# Altium PCB NEpic_small.PcbDoc (part 2 of 2)
Units mil, origin at the board's own origin, x right, y up, seen from the top; angles counter-clockwise.
Board outline 1373 x 1857 mil, 4 copper layers (Top Layer, GND, VCC, Bottom Layer); 29 components, 61 nets, 188 pads, 110 vias.
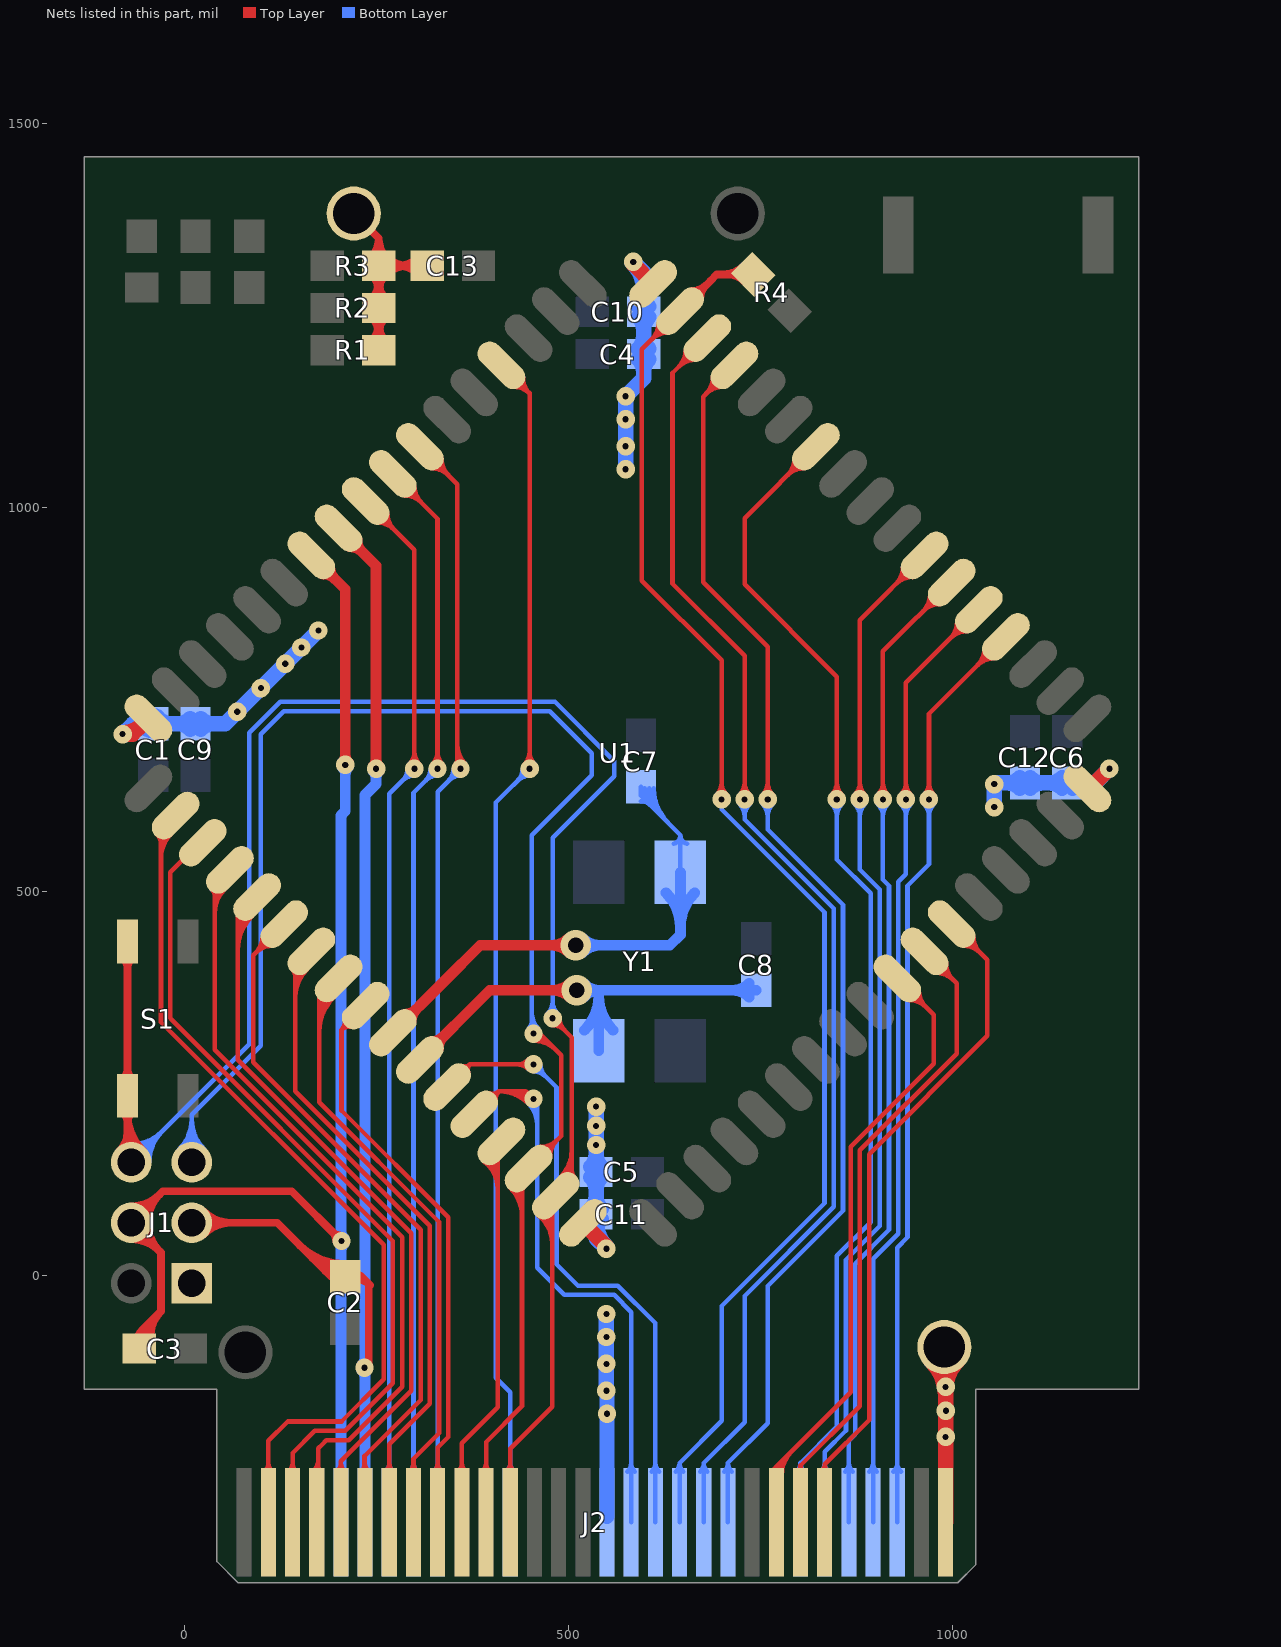
[diagram p4: the nets of this part, all layers, seen from the top]

## Via types
v1: diameter 24, hole 8, Top Layer to Bottom Layer, tented both sides, 106 vias
v2: diameter 40, hole 20, Top Layer to Bottom Layer, tented both sides, 2 vias
v3: diameter 150, hole 126, Top Layer to Bottom Layer, tented both sides, 2 vias

## Nets (pads, with @x,y where several pads share a name; then routed paths per layer and width w, separated by ;. In a path a pad name is that pad's centre, name@x,y a point inside that pad or via, vN(x,y) a via of type N, cw(c..) or ccw(c..) an arc to the next point about the centre after c; other vN are vias at no path point) (continued)
P2.0: J2.5 U1.38 | length 1379.8
  Top Layer w6: v1@963.64,626.36 ccw(c948.27,641.73) 970,641.73 ccw(c991.73,641.73) v1@976.36,626.36 ; v1(970,620) 970,731.45 U1.38@1070.28,831.72 ; U1.38@1042.22,816.41 cw(c1011.44,816.41) 1033.2,794.65 cw(c1054.96,772.89) U1.38@1054.96,803.66 ; U1.38@1048.22,816.41 cw(c1031.93,816.41) 1043.45,804.89 cw(c1054.96,793.37) U1.38@1054.96,809.66
  Bottom Layer w6: J2.5@923.86,-255.4 ccw(c912.18,-243.72) 928.7,-243.72 ccw(c945.22,-243.72) J2.5@933.54,-255.4 ; J2.5@928.7,-321.26 928.7,36.4 942,49.7 942,507.76 970,535.76 v1(970,620) ; v1@963.64,613.64 cw(c948.27,598.27) 970,598.27 cw(c991.73,598.27) v1@976.36,613.64
P2.1: J2.7 U1.39 | length 1413.5
  Top Layer w6: v1@933.64,626.36 ccw(c918.27,641.73) 940,641.73 ccw(c961.73,641.73) v1@946.36,626.36 ; v1(940,620) 940,772.16 U1.39@1034.92,867.08 ; U1.39@1006.86,851.77 cw(c976.08,851.77) 997.85,830 cw(c1019.61,808.24) U1.39@1019.61,839.02 ; U1.39@1012.86,851.77 cw(c996.57,851.77) 1008.09,840.25 cw(c1019.61,828.73) U1.39@1019.61,845.02
  Bottom Layer w6: J2.7@892.37,-255.4 ccw(c880.69,-243.72) 897.2,-243.72 ccw(c913.72,-243.72) J2.7@902.04,-255.4 ; J2.7@897.2,-321.26 897.2,21.88 930,54.67 930,512.73 940,522.73 v1(940,620) ; v1@933.64,613.64 cw(c918.27,598.27) 940,598.27 cw(c961.73,598.27) v1@946.36,613.64
P2.3: J2.9 U1.40 | length 1453.9
  Top Layer w6: v1@903.64,626.36 ccw(c888.27,641.73) 910,641.73 ccw(c931.73,641.73) v1@916.36,626.36 ; v1(910,620) 910,812.87 U1.40@999.56,902.43 ; U1.40@971.5,887.12 cw(c940.73,887.12) 962.49,865.36 cw(c984.25,843.6) U1.40@984.25,874.37 ; U1.40@977.5,887.12 cw(c961.21,887.12) 972.73,875.6 cw(c984.25,864.08) U1.40@984.25,880.37
  Bottom Layer w6: J2.9@860.87,-255.4 ccw(c849.19,-243.72) 865.71,-243.72 ccw(c882.23,-243.72) J2.9@870.55,-255.4 ; J2.9@865.71,-321.26 865.71,-214.95 874,-206.66 874,15.64 918,59.64 918,507.76 910,515.76 v1(910,620) ; v1@903.64,613.64 cw(c888.27,598.27) 910,598.27 cw(c931.73,598.27) v1@916.36,613.64
P2.6: J2.11 U1.41 | length 1502.6
  Top Layer w6: v1@873.64,626.36 ccw(c858.27,641.73) 880,641.73 ccw(c901.73,641.73) v1@886.36,626.36 ; v1(880,620) 880,853.58 U1.41@964.21,937.79 ; U1.41@936.15,922.48 cw(c905.37,922.48) 927.14,900.71 cw(c948.9,878.95) U1.41@948.9,909.73 ; U1.41@942.15,922.48 cw(c925.86,922.48) 937.38,910.96 cw(c948.9,899.44) U1.41@948.9,915.73
  Bottom Layer w6: J2.11@829.37,-255.4 ccw(c817.69,-243.72) 834.21,-243.72 ccw(c850.73,-243.72) J2.11@839.05,-255.4 ; J2.11@834.21,-321.26 834.21,-229.47 862,-201.69 862,20.61 906,64.61 906,502.79 880,528.79 v1(880,620) ; v1@873.64,613.64 cw(c858.27,598.27) 880,598.27 cw(c901.73,598.27) v1@886.36,613.64
P5.0: J2.58 U1.2 | length 1271.1
  Top Layer w6: U1.2@-35.31,574.66 cw(c-48.13,561.84) -30,561.84 ; -30,543.96 cw(c13.42,543.96) U1.2@-17.28,574.66 ; -30,558.45 cw(c-1.07,558.45) U1.2@-21.53,578.91 ; U1.2@-27,582.98 U1.2@-10.99,598.99 -30,579.98 -30,330 260,40 260,-135 205,-190 135,-190 109.8,-215.2 J2.58@109.8,-321.26 ; J2.58@104.96,-255.4 ccw(c93.28,-243.72) 109.8,-243.72 ccw(c126.32,-243.72) J2.58@114.64,-255.4
P5.1: J2.56 U1.3 | length 1161.1
  Top Layer w6: U1.3@1,540.26 U1.3@24.37,563.63 20.63,563.63 -18,525 -18,334.97 272,44.97 272,-139.97 209.97,-202 170.3,-202 141.3,-231 J2.56@141.3,-321.26 ; J2.56@136.46,-255.4 ccw(c124.78,-243.72) 141.3,-243.72 ccw(c157.82,-243.72) J2.56@146.14,-255.4
P5.2: J2.54 U1.4 | length 1152.8
  Top Layer w6: U1.4@35.4,503.95 cw(c24.29,492.84) 40,492.84 ; U1.4@37,505.55 U1.4@59.72,528.28 40,508.55 40,293.94 284,49.94 284,-144.94 214.31,-214.63 185.37,-214.63 180,-220 175,-225 175,-319.06 J2.54@172.8,-321.26 ; 40,471.54 cw(c85.84,471.54) U1.4@53.43,503.95 ; 40,486.02 cw(c71.36,486.02) U1.4@49.18,508.2 ; J2.54@167.96,-255.4 ccw(c150.95,-238.39) 175,-238.39 ; 175,-249.04 ccw(c183.99,-249.04) J2.54@177.63,-255.4
P5.3: J2.52 U1.5 | length 1123.2
  Top Layer w6: 70,423.25 cw(c134.13,423.25) U1.5@88.78,468.6 ; 70,437.74 cw(c119.64,437.74) U1.5@84.54,472.84 ; 70,452.22 cw(c105.16,452.22) U1.5@80.3,477.08 ; U1.5@78,475.84 U1.5@95.08,492.92 70,467.84 70,280.91 296,54.91 296,-149.91 204.29,-241.62 J2.52@204.29,-321.26 ; J2.52@199.45,-255.4 ccw(c187.77,-243.72) 204.29,-243.72 ccw(c220.81,-243.72) J2.52@209.13,-255.4
P5.4: J2.50 U1.6 | length 1042.4
  Top Layer w6: U1.6@102.38,442.26 cw(c71.6,442.26) 93.36,420.49 cw(c115.12,398.73) U1.6@115.12,429.51 ; U1.6@108.38,442.26 cw(c92.09,442.26) 103.61,430.74 cw(c115.12,419.22) U1.6@115.12,435.51 ; U1.6@112,439.13 U1.6@130.44,457.57 90,417.13 90,277.88 308,59.88 308,-162 235,-235 235,-320.47 J2.50@235.79,-321.26 ; J2.50@230.95,-255.4 ccw(c221.17,-245.62) 235,-245.62 ; 235,-241.82 ccw(c254.21,-241.82) J2.50@240.63,-255.4
P5.5: J2.48 U1.7 | length 964.3
  Top Layer w6: U1.7@141.46,397.89 cw(c132.93,389.35) 145,389.35 ; 145,362.9 cw(c194.48,362.9) U1.7@159.49,397.89 ; 145,377.38 cw(c180,377.38) U1.7@155.25,402.13 ; 145,391.87 cw(c165.51,391.87) U1.7@151.01,406.37 ; U1.7@165.79,422.21 145,401.42 145,239.85 320,64.85 320,-166.97 267.28,-219.69 J2.48@267.28,-321.26 ; J2.48@262.45,-255.4 ccw(c250.76,-243.72) 267.28,-243.72 ccw(c283.8,-243.72) J2.48@272.12,-255.4
P5.6: J2.46 U1.8 | length 973.5
  Top Layer w6: 175.99,316.99 cw(c240.39,316.99) U1.8@194.85,362.53 ; 175.99,331.47 cw(c225.9,331.47) U1.8@190.61,366.77 ; 175.99,345.96 cw(c211.42,345.96) U1.8@186.36,371.02 ; U1.8@177.79,363.5 U1.8@201.15,386.86 175.99,361.7 175.99,225.84 332,69.82 332,-205.16 298.78,-238.38 J2.46@298.78,-321.26 ; J2.46@293.94,-255.4 ccw(c282.26,-243.72) 298.78,-243.72 ccw(c315.3,-243.72) J2.46@303.62,-255.4
P5.7: J2.44 U1.9 | length 834.3
  Top Layer w6: U1.9@208.78,333.28 cw(c194.97,330.03) 205,320 ; U1.9@215,330 U1.9@236.5,351.5 205,320 ; U1.9@218.28,323.78 ccw(c215.03,309.97) 205,320 ; J2.44@325.44,-255.4 ccw(c313.76,-243.72) 330.28,-243.72 ccw(c346.79,-243.72) J2.44@335.11,-255.4 ; J2.44@330.28,-321.26 330.28,-223.86 344,-210.13 344,76 205,215 205,320
RADIO_CCA: J2.21 U1.49 | length 1891.2
  Top Layer w6: U1.49@653.31,1205.32 cw(c622.53,1205.32) 644.29,1183.56 cw(c666.05,1161.79) U1.49@666.05,1192.57 ; U1.49@659.31,1205.32 cw(c643.02,1205.32) 654.54,1193.8 cw(c666.05,1182.28) U1.49@666.05,1198.57 ; U1.49@681.37,1220.63 636,1175.26 636,901 730,807 v1(730,620) v1@725.79,624.21 ; v1@723.64,626.36 ccw(c708.27,641.73) 730,641.73 ccw(c751.73,641.73) v1@736.36,626.36
  Bottom Layer w6: J2.21@671.95,-255.34 ccw(c660.89,-244) 676.73,-244 ; J2.21@676.73,-321.26 676.73,-244 ; J2.21@681.51,-255.34 cw(c692.57,-244) 676.73,-244 ; v1@723.64,613.64 cw(c708.27,598.27) 730,598.27 cw(c751.73,598.27) v1@736.36,613.64 ; v1(730,620) 730,593.94 846,477.94 846,89.46 730,-26.54 730,-190.73 676.73,-244
RADIO_CS: J2.19 U1.48 | length 1828.3
  Top Layer w6: U1.48@688.66,1169.96 cw(c657.89,1169.96) 679.65,1148.2 cw(c701.41,1126.44) U1.48@701.41,1157.22 ; U1.48@694.66,1169.96 cw(c678.37,1169.96) 689.89,1158.45 cw(c701.41,1146.93) U1.48@701.41,1163.22 ; U1.48@716.72,1185.28 676,1144.55 676,903.09 760,819.09 v1(760,620) ; v1@753.64,626.36 ccw(c738.27,641.73) 760,641.73 ccw(c781.73,641.73) v1@766.36,626.36
  Bottom Layer w6: J2.19@703.45,-255.34 ccw(c692.39,-244) 708.23,-244 ; J2.19@708.23,-321.26 708.23,-244 ; J2.19@713.01,-255.34 cw(c724.07,-244) 708.23,-244 ; v1@753.64,613.64 cw(c738.27,598.27) 760,598.27 cw(c781.73,598.27) v1@766.36,613.64 ; v1(760,620) 760,580.91 858,482.91 858,84.49 760,-13.51 760,-192.23 708.23,-244
RADIO_SFD: J2.23 R4.1 U1.50 | length 2122.3
  Top Layer w6: U1.50@617.95,1240.67 cw(c587.18,1240.67) 608.94,1218.91 cw(c630.7,1197.15) U1.50@630.7,1227.93 ; U1.50@623.95,1240.67 cw(c607.66,1240.67) 619.18,1229.16 cw(c630.7,1217.64) U1.50@630.7,1233.93 ; U1.50@648.66,1255.99 U1.50@646.01,1255.99 596,1205.97 596,905 700,801 v1(700,620) ; v1@693.64,626.36 ccw(c678.27,641.73) 700,641.73 ccw(c721.73,641.73) v1@706.36,626.36
  Top Layer w10: U1.50@646.01,1255.99 685,1294.97 ; U1.50@661.32,1282.05 ccw(c661.32,1307.99) 679.67,1289.65 ccw(c698.02,1271.3) U1.50@672.07,1271.3 ; 685,1295 693.66,1303.66 R4.1@741.34,1303.66 ; 701.13,1303.66 ccw(c701.13,1343.87) R4.1@729.56,1315.44 ; 707.85,1303.66 cw(c707.85,1272.96) R4.1@729.56,1294.67
  Bottom Layer w6: J2.23@640.46,-255.34 ccw(c629.4,-244) 645.24,-244 ; J2.23@645.24,-321.26 645.24,-244 ; J2.23@650.01,-255.34 cw(c661.08,-244) 645.24,-244 ; v1(700,620) 700,606.97 834,472.97 834,94.43 700,-39.57 700,-189.24 645.24,-244
RFTXRX: J2.13 U1.45 | length 1712.1
  Top Layer w6: U1.45@794.73,1063.9 cw(c763.95,1063.9) 785.71,1042.14 cw(c807.48,1020.37) U1.45@807.48,1051.15 ; U1.45@800.73,1063.9 cw(c784.44,1063.9) 795.96,1052.38 cw(c807.48,1040.86) U1.45@807.48,1057.15 ; U1.45@822.79,1079.21 730,986.42 730,900 850,780 v1(850,620) ; v1@843.64,626.36 ccw(c828.27,641.73) 850,641.73 ccw(c871.73,641.73) v1@856.36,626.36
  Bottom Layer w6: J2.13@797.94,-255.34 ccw(c786.88,-244) 802.72,-244 ; J2.13@802.72,-321.26 802.72,-244 ; J2.13@807.49,-255.34 cw(c818.56,-244) 802.72,-244 ; v1@843.64,613.64 cw(c828.27,598.27) 850,598.27 cw(c871.73,598.27) v1@856.36,613.64 ; v1(850,620) 850,541.82 894,497.82 894,69.58 850,25.58 850,-196.72 802.72,-244
RST: J1.6 J2.38 S1.2 S1.4 U1.16 | length 3204.4
  Top Layer w6: J2.38@419.93,-255.4 ccw(c408.24,-243.72) 424.76,-243.72 ccw(c441.28,-243.72) J2.38@429.6,-255.4 ; J2.38@424.76,-321.26 424.76,-225.24 479.28,-170.72 479.28,43.1 479.28,99.31 U1.16@483.99,104.01 505,125.02 505,310 v1(480,335) ; U1.16@461.01,78.52 cw(c433.42,41.88) 479.28,41.88 ; U1.16@464.62,83.31 cw(c442.48,53.91) 479.28,53.91 ; U1.16@468.23,88.11 cw(c451.54,65.94) 479.28,65.94 ; v1@480,326 cw(c480,304.27) 495.36,319.64 cw(c510.73,335) v1@489,335 ; U1.16@490.29,128.34 ccw(c454.77,163.86) 505,163.86 ; U1.16@494.53,124.1 ccw(c469.25,149.37) 505,149.37 ; U1.16@498.77,119.85 ccw(c483.74,134.89) 505,134.89 ; 505,136.34 ccw(c516.32,136.34) U1.16@508.32,128.34
  Top Layer w10: J1.6@-83.94,162.68 ccw(c-108.57,187.31) -73.74,187.31 ccw(c-28.91,187.31) J1.6@-60.61,155.61 ; S1.2@-79.95,213.24 cw(c-94.94,198.25) -73.74,198.25 cw(c-52.54,198.25) S1.2@-67.53,213.24 ; S1.2@-79.95,255.18 ccw(c-94.94,270.17) -73.74,270.17 ccw(c-52.54,270.17) S1.2@-67.53,255.18 ; S1.4@-79.95,414.03 cw(c-94.94,399.04) -73.74,399.04 cw(c-52.54,399.04) S1.4@-67.53,414.03 ; S1.2@-73.74,211.46 ccw(c-4.76,211.46) J1.6@-53.54,162.68 ; S1.4@-73.74,430 -73.74,229.21 -73.74,152.48 J1.6@-68.74,147.48
  Bottom Layer w6: J1.6@-68.74,147.48 85,301.22 85,706.97 125.03,747 473.06,747 483,747 560,670 560,663.33 560,650 480,570 v1(480,335) ; J1.6@-68.74,158.98 ccw(c-68.74,186.74) -49.11,167.11 ccw(c-29.48,147.48) J1.6@-57.24,147.48 ; J1.6@-68.74,164.98 ccw(c-68.74,207.23) -38.87,177.35 ccw(c-8.99,147.48) J1.6@-51.24,147.48 ; J1.6@-68.74,170.98 ccw(c-68.74,227.71) -28.62,187.6 ccw(c11.49,147.48) J1.6@-45.24,147.48 ; v1@473.64,341.36 ccw(c458.27,356.73) 480,356.73 ccw(c501.73,356.73) v1@486.36,341.36
SCLK0/SCL: J2.43 U1.58 | length 1619.2
  Top Layer w6: U1.58@307.21,1079.21 356,1030.42 356,664 v1(360,660) ; U1.58@322.52,1051.15 cw(c322.52,1020.37) 344.29,1042.14 cw(c366.05,1063.9) U1.58@335.27,1063.9 ; U1.58@322.52,1057.15 cw(c322.52,1040.86) 334.04,1052.38 cw(c345.56,1063.9) U1.58@329.27,1063.9 ; v1@353.64,666.36 ccw(c347.93,672.07) 356,672.07 ; 356,676.9 ccw(c376.9,676.9) v1@362.12,662.12 ; 356,691.38 ccw(c391.38,691.38) v1@366.36,666.36
  Bottom Layer w6: J2.43@325.44,-255.4 ccw(c313.76,-243.72) 330.28,-243.72 ccw(c346.79,-243.72) J2.43@335.11,-255.4 ; J2.43@330.28,-321.26 330.28,630.28 v1(360,660) ; v1@351,660 cw(c329.27,660) 344.64,644.64 cw(c360,629.27) v1@360,651
STE0: J2.37 U1.55 | length 1686.4
  Top Layer w6: U1.55@413.28,1185.28 449.28,1149.28 ; U1.55@429.05,1157.23 cw(c430.05,1130.05) 449.28,1149.28 ; U1.55@441.33,1169.5 ccw(c468.51,1168.51) 449.28,1149.28 ; v1@443.64,666.36 ccw(c428.27,681.73) 450,681.73 ccw(c471.73,681.73) v1@456.36,666.36 ; v1(450,660) 450,1149.28
  Bottom Layer w6: J2.37@419.93,-255.4 ccw(c408.24,-243.72) 424.76,-243.72 ccw(c441.28,-243.72) J2.37@429.6,-255.4 ; J2.37@424.76,-321.26 424.76,-151.73 406,-132.97 406,616 v1(450,660) ; v1@441,660 cw(c419.27,660) 434.64,644.64 cw(c450,629.27) v1@450,651
TCK: J1.5 J2.40 U1.15 | length 2655.6
  Top Layer w6: J2.40@388.43,-255.4 ccw(c376.75,-243.72) 393.27,-243.72 ccw(c409.79,-243.72) J2.40@398.11,-255.4 ; J2.40@393.27,-321.26 393.27,-216.73 440,-170 440,130.74 U1.15@448.63,139.37 491,181.74 491,287.03 463.03,315 v1(455,315) ; U1.15@424.31,115.04 cw(c386.43,77.16) 440,77.16 ; U1.15@428.55,119.29 cw(c400.91,91.65) 440,91.65 ; U1.15@432.79,123.53 cw(c415.4,106.13) 440,106.13 ; 440,109.4 cw(c447.98,109.4) U1.15@442.34,115.04 ; v1@455,306 cw(c455,264.89) 484.07,293.96 ; v1@455,312 cw(c455,285.37) 473.83,304.2 ; U1.15@463.95,161.43 ccw(c463.95,177.72) 475.46,166.2 ccw(c486.98,154.68) U1.15@470.69,154.68 ; U1.15@463.95,167.43 ccw(c463.95,198.21) 485.71,176.44 ccw(c507.47,154.68) U1.15@476.69,154.68
  Bottom Layer w6: J1.5@-6.62,164.1 ccw(c-46.73,204.21) 10,204.21 ccw(c66.73,204.21) J1.5@26.62,164.1 ; J1.5@-2.37,159.85 ccw(c-32.25,189.73) 10,189.73 ccw(c52.25,189.73) J1.5@22.37,159.85 ; J1.5@1.87,155.61 ccw(c-17.76,175.24) 10,175.24 ccw(c37.76,175.24) J1.5@18.13,155.61 ; J1.5@10,147.48 10,209.25 100,299.25 100,705 130,735 476,735 531,680 531,651.3 518.7,639 453,573.3 453,325.03 v1@463.79,314.24 ; v1@448.64,321.36 ccw(c438.1,331.9) 453,331.9 ; 453,327.07 ccw(c467.07,327.07) v1@457.12,317.12 ; 453,341.56 ccw(c481.56,341.56) v1@461.36,321.36
TDI/TCLK: J2.27 U1.13 | length 934.3
  Top Layer w6: U1.13@377.92,210.08 380.08,210.08 410,240 ; U1.13@397.7,237.33 ccw(c401.78,248.22) 410,240 ; U1.13@405.84,227.31 cw(c420.45,229.54) 410,240 ; 424.21,240 cw(c424.21,200.04) v1@452.85,227.91 ; 438.42,240 cw(c438.42,213.87) v1@457.15,232.09 ; v1@448.55,223.72 ccw(c410,186.22) 410,240 ; v1(455,230) 445,240 410,240
  Bottom Layer w6: v1@448.64,223.64 cw(c421.2,196.2) 460,196.2 ; v1@452.88,227.88 cw(c435.69,210.69) 460,210.69 ; v1(455,230) 460,225 460,10 495,-25 560,-25 582.5,-47.5 582.24,-47.76 J2.27@582.24,-321.26 ; J2.27@577.41,-255.4 ccw(c565.72,-243.72) 582.24,-243.72 ccw(c598.76,-243.72) J2.27@587.08,-255.4
TDO/TDI: J2.25 U1.12 | length 939.6
  Top Layer w6: U1.12@337.86,240.73 U1.12@342.57,245.44 372.13,275 ; U1.12@362.16,272.75 ccw(c365.37,281.76) 372.13,275 ; U1.12@369.89,265.03 cw(c378.89,268.24) 372.13,275 ; v1@448.64,268.64 ccw(c433.27,253.27) 433.27,275 ccw(c433.27,296.73) v1@448.64,281.36 ; v1(455,275) 372.13,275
  Bottom Layer w6: v1@455,266 cw(c455,244.27) 470.36,259.64 cw(c485.73,275) v1@464,275 ; v1(455,275) 485,245 485,15 513,-13 564.97,-13 613.74,-61.77 J2.25@613.74,-321.26 ; J2.25@608.9,-255.4 ccw(c597.22,-243.72) 613.74,-243.72 ccw(c630.26,-243.72) J2.25@618.58,-255.4
TMS: J2.42 U1.14 | length 645.4
  Top Layer w6: J2.42@356.93,-255.4 ccw(c345.25,-243.72) 361.77,-243.72 ccw(c378.29,-243.72) J2.42@366.61,-255.4 ; J2.42@361.77,-321.26 361.77,-218.23 408.57,-171.43 408.57,113.81 408.57,170.02 U1.14@413.28,174.72 ; U1.14@390.3,149.23 cw(c362.72,112.59) 408.57,112.59 ; U1.14@393.91,154.02 cw(c371.77,124.62) 408.57,124.62 ; U1.14@397.52,158.82 cw(c380.83,136.65) 408.57,136.65
UART0RX: J2.47 U1.60 | length 1537.8
  Top Layer w6: U1.60@236.5,1008.5 300,945 v1(300,660) ; U1.60@251.81,980.44 cw(c251.81,949.66) 273.58,971.42 cw(c295.34,993.19) U1.60@264.56,993.19 ; U1.60@251.81,986.44 cw(c251.81,970.15) 263.33,981.67 cw(c274.85,993.19) U1.60@258.56,993.19 ; v1@293.64,666.36 ccw(c278.27,681.73) 300,681.73 ccw(c321.73,681.73) v1@306.36,666.36
  Bottom Layer w6: J2.47@262.45,-255.4 ccw(c250.76,-243.72) 267.28,-243.72 ccw(c283.8,-243.72) J2.47@272.12,-255.4 ; J2.47@267.28,-321.26 267.28,627.28 v1(300,660) ; v1@291,660 cw(c269.27,660) 284.64,644.64 cw(c300,629.27) v1@300,651
UART0TX: J2.45 U1.59 | length 1570.3
  Top Layer w6: U1.59@271.86,1043.85 330,985.71 v1(330,660) ; U1.59@287.17,1015.79 cw(c287.17,985.02) 308.93,1006.78 cw(c330.69,1028.54) U1.59@299.92,1028.54 ; U1.59@287.17,1021.79 cw(c287.17,1005.5) 298.69,1017.02 cw(c310.21,1028.54) U1.59@293.92,1028.54 ; v1@323.64,666.36 ccw(c308.27,681.73) 330,681.73 ccw(c351.73,681.73) v1@336.36,666.36
  Bottom Layer w6: J2.45@293.94,-255.4 ccw(c282.26,-243.72) 298.78,-243.72 ccw(c315.3,-243.72) J2.45@303.62,-255.4 ; J2.45@298.78,-321.26 298.78,628.78 v1(330,660) ; v1@321,660 cw(c299.27,660) 314.64,644.64 cw(c330,629.27) v1@330,651
UART1RX: C3.2 J1.4 J2.51 U1.62 | length 2297.5
  Top Layer w10: J1.4@-68.74,47.24 cw(c-68.74,-4.67) -32.04,32.04 cw(c4.67,68.74) -47.24,68.74 cw(c4.67,68.74) -32.04,105.44 cw(c-68.74,142.15) J1.4@-68.74,90.24 ; J1.4@-68.74,57.24 cw(c-68.74,29.48) -49.11,49.11 cw(c-29.48,68.74) -57.24,68.74 cw(c-29.48,68.74) -49.11,88.37 cw(c-68.74,108) J1.4@-68.74,80.24 ; C3.2@-61.71,-81.27 ccw(c-65.42,-71.54) -55,-71.54 ; C3.2@-61.64,-96.32 cw(c-36.32,-89.83) -54.81,-71.34 ; C3.2@-55,-95 -55,-71.54 ; C3.2@-51.96,-93.84 cw(c-16.58,-84.77) -42.4,-58.94 ; C3.2@-48.86,-82.45 cw(c-42.22,-71.54) -55,-71.54 ; C3.2@-42.27,-91.35 cw(c3.17,-79.7) -30,-46.54 ; v1@198,45 ccw(c181.1,45) 193.05,56.95 ccw(c205,68.9) v1@205,52 ; v1(205,45) 140,110 25.55,110 -27.5,109.98 J1.4@-68.74,68.74 -30,30 -30,-46.54 ; -55,-71.54 -30,-46.54
  Top Layer w14: U1.62@165.79,937.79 210,893.58 v1(210,665) ; U1.62@181.1,913.73 cw(c181.1,892.61) 196.04,907.54 cw(c210.97,922.48) U1.62@189.85,922.48 ; v1@206.46,668.54 ccw(c197.93,677.07) 210,677.07 ccw(c222.07,677.07) v1@213.54,668.54
  Bottom Layer w14: J2.51@204.29,-321.26 204.29,599.2 210,604.91 v1(210,665) ; 204.29,31.22 cw(c218.78,31.22) v1@208.54,41.46 ; 204.29,58.78 ccw(c218.78,58.78) v1@208.54,48.54 ; v1@206.46,661.46 cw(c197.93,652.93) 210,652.93 cw(c222.07,652.93) v1@213.54,661.46
UART1TX: C2.2 J1.3 J2.49 U1.61 | length 2138.6
  Top Layer w10: J1.3@10,68.74 121.26,68.74 191.54,-1.54 C2.2@210,-1.54 231.54,-1.54 ; J1.3@18.13,60.61 cw(c37.76,40.98) 37.76,68.74 cw(c37.76,96.5) J1.3@18.13,76.87 ; J1.3@25.2,53.54 cw(c61.91,16.83) 61.91,68.74 cw(c61.91,120.65) J1.3@25.2,83.94 ; 150.05,39.95 ccw(c210,99.9) C2.2@210,15.12 ; 167.12,22.88 ccw(c210,65.76) C2.2@210,5.12 ; 184.19,5.81 ccw(c210,31.61) C2.2@210,-4.88 ; C2.2@207.62,1.25 cw(c217.4,-18.27) 232.83,-2.83 ; C2.2@212.1,-7.69 cw(c223.94,-31.33) 242.63,-12.63 ; C2.2@223.67,-6.9 cw(c231.53,-9.98) 231.53,-1.54 ; C2.2@223.67,3.83 ccw(c231.53,6.91) 231.53,-1.54 ; v1(235,-120) 240.69,-114.31 240.69,-10.69 231.54,-1.54
  Top Layer w14: U1.61@201.15,973.14 250,924.29 v1(250,660) ; U1.61@216.46,949.08 cw(c216.46,927.96) 231.39,942.9 cw(c246.32,957.83) U1.61@225.21,957.83 ; v1@246.46,663.54 ccw(c237.93,672.07) 250,672.07 ccw(c262.07,672.07) v1@253.54,663.54
  Bottom Layer w14: v1@231.46,-123.54 cw(c221.03,-133.97) 235.79,-133.97 ; v1@231.46,-116.46 ccw(c221.03,-106.03) 235.79,-106.03 ; J2.49@235.79,-321.26 235.79,625.79 250,640 v1(250,660) ; v1@246.46,656.46 cw(c237.93,647.93) 250,647.93 cw(c262.07,647.93) v1@253.54,656.46
VCC: C1.2 C4.2 C5.2 C6.2 C9.2 C10.2 C11.2 C12.2 C13.2 J1.1 J2.2 J2.29 pad.0@221,1383 pad.0@990,-93 R1.1 R2.1 R3.1 U1.17 U1.34 U1.51 U1.68 | length 3237.5
  Top Layer w6: U1.34@1176.34,632.12 U1.34@1176.34,634.34
  Top Layer w10: pad.0@221,1383 253.46,1350.54 R3.1@253.46,1315 ; R1.1@243.08,1215.38 ccw(c218.01,1240.45) 253.46,1240.45 ccw(c288.92,1240.45) R1.1@263.85,1215.38 ; R2.1@243.08,1249.62 cw(c218.01,1224.55) 253.46,1224.55 cw(c288.92,1224.55) R2.1@263.85,1249.62 ; R2.1@243.08,1270.38 ccw(c218.01,1295.45) 253.46,1295.45 ccw(c288.92,1295.45) R2.1@263.85,1270.38 ; R3.1@243.08,1304.62 cw(c218.01,1279.55) 253.46,1279.55 cw(c288.92,1279.55) R3.1@263.85,1304.62 ; R3.1@243.08,1325.38 ccw(c218.01,1350.45) 253.46,1350.45 ccw(c288.92,1350.45) R3.1@263.85,1325.38 ; R1.1@253.46,1205 R2.1@253.46,1260 R3.1@253.46,1315 ; R3.1@265.82,1304.62 cw(c290.89,1279.55) 290.89,1315 cw(c290.89,1350.45) R3.1@265.82,1325.38 ; C13.2@304.18,1304.62 ccw(c279.11,1279.55) 279.11,1315 ccw(c279.11,1350.45) C13.2@304.18,1325.38 ; C13.2@316.54,1315 R3.1@253.46,1315 ; v1@585,1317 v1(585,1320) ; U1.34@1176.34,634.34 U1.34@1179.34,634.34
  Top Layer w20: v1(-80,705) -67,705 U1.68@-46.34,725.66 -58.53,713.46 ; v1@-80,707 ccw(c-80,743.22) U1.68@-54.39,717.61 ; U1.17@519.34,68.66 550,38 v1(550,35) ; v1@585,1317 U1.51@610.66,1291.34 ; pad.0@972.15,-110.85 cw(c924.95,-158.05) 991.69,-158.05 ; J2.2@991.69,-321.26 pad.0@991.69,-100 ; v1@991.69,-149.87 cw(c1046.87,-149.87) pad.0@1007.85,-110.85 ; U1.34@1176.34,640.09 ccw(c1176.34,661.22) 1191.28,646.28 ; U1.34@1179.34,634.34 v1(1205,660)
  Bottom Layer w6: v1(550,-150) v1@550.75,-150.75
  Bottom Layer w10: v1(1055,640) v1@1056.54,641.54
  Bottom Layer w20: v1(-80,705) -66.54,718.46 C9.2@15,718.46 53.46,718.46 v1(175,840) ; v1@-79.8,705.2 cw(c-59.09,684.49) C1.2@-44.74,710.02 ; v1@-78.59,703.59 cw(c-42.67,667.67) C1.2@-42.67,718.46 ; -67.44,717.56 cw(c-44.17,694.28) C1.2@-38.1,726.63 ; -61.15,723.85 cw(c-45.67,708.37) C1.2@-34.95,727.46 ; C1.2@-46.85,711.62 ccw(c-63.38,695.08) -63.38,718.46 ccw(c-63.38,741.85) C1.2@-46.85,725.31 ; C1.2@-33.15,711.62 cw(c-16.62,695.08) -16.62,718.46 cw(c-16.62,741.85) C1.2@-33.15,725.31 ; C9.2@8.15,711.62 ccw(c-8.38,695.08) -8.38,718.46 ccw(c-8.38,741.85) C9.2@8.15,725.31 ; C9.2@21.85,711.62 cw(c38.38,695.08) 38.38,718.46 cw(c38.38,741.85) C9.2@21.85,725.31 ; C11.2@529.69,73.15 cw(c513.15,56.62) 536.54,56.62 cw(c559.92,56.62) C11.2@543.38,73.15 ; C11.2@529.69,86.85 ccw(c513.15,103.38) 536.54,103.38 ccw(c559.92,103.38) C11.2@543.38,86.85 ; C5.2@529.69,128.15 cw(c513.15,111.62) 536.54,111.62 cw(c559.92,111.62) C5.2@543.38,128.15 ; C5.2@529.69,141.85 ccw(c513.15,158.38) 536.54,158.38 ccw(c559.92,158.38) C5.2@543.38,141.85 ; C11.2@536.54,72.33 ccw(c587.33,72.33) v1@551.41,36.41 ; v1(536.54,220) C5.2@536.54,135 536.54,48.46 v1(550,35) ; v1(550,-150) v1(550,-50) ; J2.29@550.75,-313.39 v1@550.75,-150.75 ; v1(575,1050) v1(575,1145) 598.46,1168.46 598.46,1306.54 v1(585,1320) ; v1@583.59,1318.59 cw(c547.67,1282.67) 598.46,1282.67 ; C4.2@591.62,1193.15 cw(c575.08,1176.62) 598.46,1176.62 cw(c621.85,1176.62) C4.2@605.31,1193.15 ; C4.2@591.62,1206.85 ccw(c575.08,1223.38) 598.46,1223.38 ccw(c621.85,1223.38) C4.2@605.31,1206.85 ; C10.2@591.62,1248.15 cw(c575.08,1231.62) 598.46,1231.62 cw(c621.85,1231.62) C10.2@605.31,1248.15 ; C10.2@591.62,1261.85 ccw(c575.08,1278.38) 598.46,1278.38 ccw(c621.85,1278.38) C10.2@605.31,1261.85 ; v1(1055,610) v1(1055,640) ; v1@1056.54,641.54 C12.2@1095,641.54 1186.54,641.54 v1(1205,660) ; C12.2@1088.15,634.69 ccw(c1071.62,618.15) 1071.62,641.54 ccw(c1071.62,664.92) C12.2@1088.15,648.38 ; C12.2@1101.85,634.69 cw(c1118.38,618.15) 1118.38,641.54 cw(c1118.38,664.92) C12.2@1101.85,648.38 ; C6.2@1143.15,634.69 ccw(c1126.62,618.15) 1126.62,641.54 ccw(c1126.62,664.92) C6.2@1143.15,648.38 ; C6.2@1156.85,634.69 cw(c1173.38,618.15) 1173.38,641.54 cw(c1173.38,664.92) C6.2@1156.85,648.38
  other v1: 991.69,-210 550.75,-180 992,-176 991.69,-145 550,-115 550,-80 536.54,170 536.54,195 69.29,734.29 100,765 131.76,796.76 152.82,817.82 575,1080 575,1115
VEREF+: J2.14 U1.28 | length 936.1
  Top Layer w6: J2.14@798.86,-254.58 ccw(c793.88,-247.28) 802.72,-247.28 ; J2.14@802.72,-321.26 802.72,-247.28 ; J2.14@806.57,-254.58 cw(c811.55,-247.28) 802.72,-247.28 ; U1.28@964.21,422.21 1006,380.42 1006,289.03 880,163.03 880,-65.98 880,-136.49 880,-156.97 880,-170 802.72,-247.28 ; U1.28@979.52,394.15 cw(c979.52,363.38) 1001.28,385.14 cw(c1023.05,406.9) U1.28@992.27,406.9 ; U1.28@979.52,400.15 cw(c979.52,383.86) 991.04,395.38 cw(c1002.56,406.9) U1.28@986.27,406.9
VREF+: J2.16 U1.27 | length 969.6
  Top Layer w6: J2.16@766.06,-260.24 cw(c781.27,-260.24) 770.52,-249.48 ; J2.16@767.98,-254.21 ccw(c765.05,-248.78) 771.22,-248.78 ; J2.16@771.22,-321.26 771.22,-248.78 ; J2.16@772.06,-260.24 cw(c801.76,-260.24) 780.76,-239.24 ; J2.16@774.46,-254.21 cw(c777.39,-248.78) 771.22,-248.78 ; J2.16@778.06,-260.24 cw(c822.24,-260.24) 791,-229 ; U1.27@928.85,386.86 976,339.71 976,276 868,168 868,-70.95 868,-131.52 868,-152 771.22,-248.78 ; U1.27@944.17,358.8 cw(c944.17,328.02) 965.93,349.78 cw(c987.69,371.54) U1.27@956.91,371.54 ; U1.27@944.17,364.8 cw(c944.17,348.51) 955.68,360.03 cw(c967.2,371.54) U1.27@950.91,371.54
VREF-: J2.12 U1.29 | length 980.7
  Top Layer w6: J2.12@829.88,-254.94 ccw(c822.38,-245.79) 834.21,-245.79 ; J2.12@834.21,-321.26 834.21,-245.79 ; J2.12@838.55,-254.94 cw(c846.04,-245.79) 834.21,-245.79 ; U1.29@999.56,457.57 1046,411.13 1046,312.06 892,158.06 892,-61.01 892,-141.46 892,-161.94 892,-174.97 892,-188 834.21,-245.79 ; U1.29@1014.88,429.51 cw(c1014.88,398.73) 1036.64,420.49 cw(c1058.4,442.26) U1.29@1027.62,442.26 ; U1.29@1014.88,435.51 cw(c1014.88,419.22) 1026.39,430.74 cw(c1037.91,442.26) U1.29@1021.62,442.26
XT2IN: C8.2 U1.11 Y1.2 | length 827.4
  Top Layer w14: U1.11@307.21,280.79 397.96,371.54 v2(511.54,371.54) ; U1.11@322.52,304.85 ccw(c322.52,325.97) 337.46,311.04 ccw(c352.39,296.1) U1.11@331.27,296.1 ; v2@502.34,362.34 ccw(c480.15,340.15) 480.15,371.54 ccw(c480.15,402.92) v2@502.34,380.73
  Bottom Layer w14: v2(511.54,371.54) 540,371.54 ; Y1.2@521.29,319.3 ccw(c476.11,364.48) 540,364.48 ccw(c603.89,364.48) Y1.2@558.71,319.3 ; v2@521.36,363.02 cw(c540,346.88) 540,371.54 ; v2@521.36,380.05 ccw(c540,396.19) 540,371.54 ; Y1.2@540,292.72 540,371.54 ; C8.2@736.03,362.57 ccw(c714.38,340.91) 714.38,371.54 ccw(c714.38,402.16) C8.2@736.03,380.51 ; C8.2@745,371.54 540,371.54
XT2OUT: C7.2 U1.10 Y1.1 | length 1033.3
  Top Layer w14: U1.10@271.86,316.15 339.25,383.54 385.71,430 v2(510,430) ; U1.10@287.17,340.21 ccw(c287.17,361.32) 302.1,346.39 ccw(c317.04,331.46) U1.10@295.92,331.46 ; v2@500.81,420.81 ccw(c478.62,398.62) 478.62,430 ccw(c478.62,461.38) v2@500.81,439.19
  Bottom Layer w6: C7.2@595,617.88 cw(c595,600.7) 607.15,612.85 ; C7.2@595,636.54 595,625 646.3,573.7 ; C7.2@599.68,634.57 ccw(c634.09,634.57) 609.76,610.24 ; C7.2@605.68,634.57 ccw(c654.58,634.57) 620.01,599.99 ; C7.2@611.68,634.57 ccw(c675.06,634.57) 630.25,589.75 ; Y1.1@637.63,562.08 ccw(c634.18,573.7) 646.3,573.7 ; Y1.1@646.3,525 646.3,573.7 ; Y1.1@654.97,562.08 cw(c658.42,573.7) 646.3,573.7
  Bottom Layer w14: v2(510,430) 632.6,430 646.3,443.7 Y1.1@646.3,525 ; v2@519.19,420.81 cw(c541.38,398.62) 541.38,430 cw(c541.38,461.38) v2@519.19,439.19 ; Y1.1@627.59,498.41 cw(c582.41,453.23) 646.3,453.23 cw(c710.19,453.23) Y1.1@665.01,498.41
pads on no net: E1. J2.1 J2.30 J2.32 J2.59 U1.63 U1.64 Y1.

## Polygon pours and split planes (outlines as drawn)
GND on Top Layer "Top Layer-No Net" (solid, pour order 1000): 800,1030 910,920 840,850 730,960
GND on Bottom Layer "Top Layer-No Net" (solid): 980,695 1155,695 1155,750 980,750
GND on GND (split plane): 750,1290 1222.9,817.1 1222.9,-127.93 1031.06,-127.93 1027.14,-128.32 1023.37,-129.46 1019.9,-131.32 1016.85,-133.82 1014.35,-136.87 1012.5,-140.34 1011.35,-144.11 1010.97,-148.03 1010.97,-368.05 999.12,-379.9 78.76,-379.9 62.97,-364.12 62.97,-148.03 62.58,-144.11 61.44,-140.34 59.58,-136.87 57.08,-133.82 54.04,-131.32 50.56,-129.46 46.79,-128.32 42.87,-127.93 -109.9,-127.93 -109.9,1436.9 750,1436.9
VCC on VCC (split plane): 750,1290 1222.9,817.1 1222.9,-127.93 1031.06,-127.93 1027.14,-128.32 1023.37,-129.46 1019.9,-131.32 1016.85,-133.82 1014.35,-136.87 1012.5,-140.34 1011.35,-144.11 1010.97,-148.03 1010.97,-368.05 999.12,-379.9 78.76,-379.9 62.97,-364.12 62.97,-148.03 62.58,-144.11 61.44,-140.34 59.58,-136.87 57.08,-133.82 54.04,-131.32 50.56,-129.46 46.79,-128.32 42.87,-127.93 -109.9,-127.93 -109.9,1436.9 750,1436.9

## Keep-outs
Keep-Out Layer:
  lines w10: 54.68,-140 -115,-140 -115,1439 1235,1439 1235,545 1235,205 1235,-120 1030,-120 1023.19,-126.81 1023.19,-140

## Other copper
VCC (plane layer: these items are gaps in the copper):
  region: 750,1580 750,1290 1360,680 1360,1580
GND (plane layer: these items are gaps in the copper):
  region: 750,1580 750,1290 1370,670 1370,1580

## Silkscreen, mask and mechanical layers (free items; w line width, h text height)
Top Overlay:
  circle w10: c230,100 r7.07
  lines w5: 115,95 210,95 210,305 115,305 115,95
  lines w10: 225,100 237.07,100 ; 1046.71,-100.74 1083.06,-100.74 ; 1054.53,-107.04 1079.35,-107.04 ; 1067.49,-108.23 1067.49,-120 1044.32,-96.84 1085.73,-96.84 ; 1040,-90 1090,-90 1065,-130 1040,-90
  text "VCC +" at 260,1400 h60
  text "GND -" at 535,1400 h60
  text "NEpic" at 925,170 h100
  text "GND  RX  RST" at 149.46,115 h30 r90
  text "VCC  TX  TCK" at 190,115 h30 r90
  text "01-21-10" at 925.2,110 h60
  text "MINIPROG" at 100,90 h50 r90
  text "VCC +" at 789,-114 h60
  text "GND -" at 105,-160 h60
Mechanical 14:
  lines w10: 38.94,-148.03 -130,-148.03 -130,1457 1243,1457 1243,-148.03 1031.06,-148.03
Mechanical 15:
  lines w10: -584,116 -304,116 -304,416 -584,416 ; 1646,116 1356,116 1356,416 1646,416
Drill Drawing:
  text ".LEGEND" at 2116,-384 h60
  text "Drill Drawing." at 2116,-484 h60

## Dimensions
1050,1100 to 50,1100 on Mechanical 1
1050,1100 to 1009.41,-400 on Mechanical 1
1243,1457 to 1009.41,-400 on Mechanical 1
-130,-148.03 to -130,1457 on Mechanical 1
-130,1457 to 1243,1457 on Mechanical 1

## Text inside footprints (layer, text, board x,y; h text height)
J2: Top Overlay "60" at 95,-205 h60; Top Overlay "2" at 934,-190 h60